# Altium PCB WeeMouseMasterCompact.PcbDoc
Units mm, origin at the board's own origin, x right, y up, seen from the top; angles counter-clockwise.
Board outline 15.6 x 17.3 mm, 2 copper layers (Top Layer, Bottom Layer), stack 1.671 mm thick; 6 components, 13 nets, 37 pads, 25 vias.
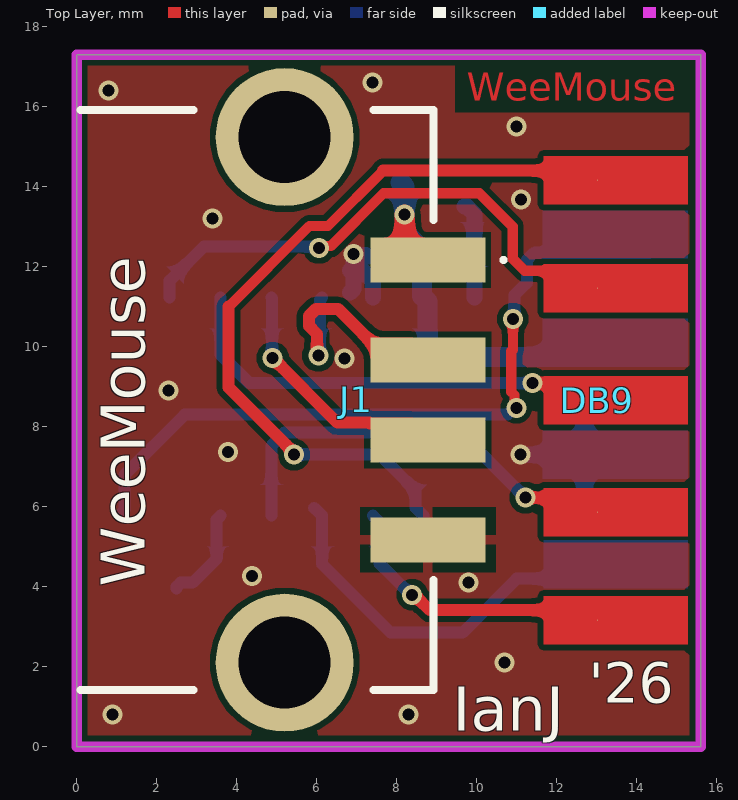
[diagram p0: Top Layer view]
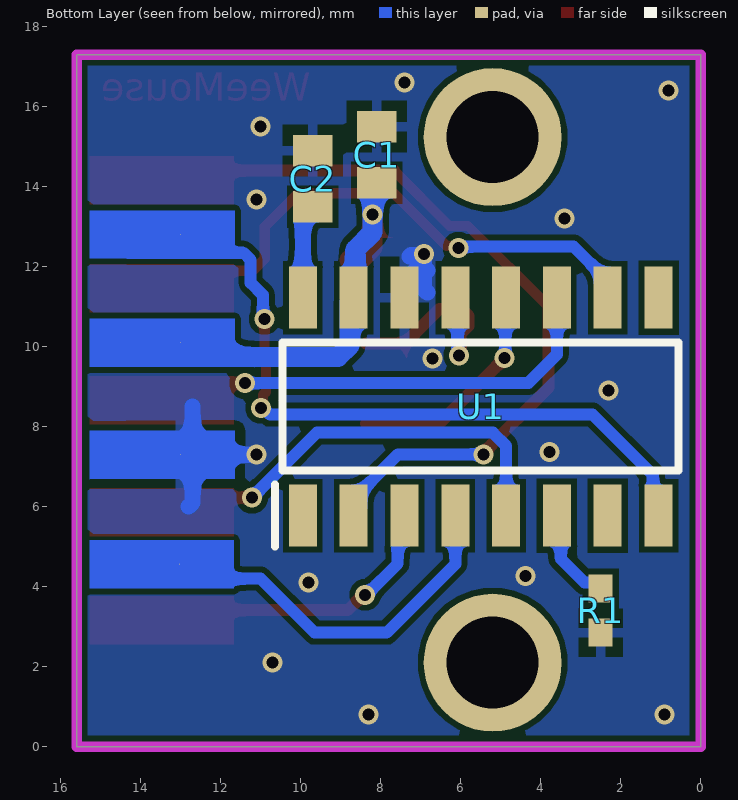
[diagram p1: Bottom Layer view, seen from below]

## Layer stack, top to bottom
Top Solder: solder mask 0.0102, Solder Resist, Dk 3.5
Top Layer: signal copper 0.0356
Dielectric 1: dielectric 0.2, FR-4, Dk 4.8
Dielectric 2: core 1.2, PP-006, Dk 4.1
Dielectric2: dielectric 0.2, FR-4, Dk 4.8
Bottom Layer: signal copper 0.0356
Bottom Solder: solder mask 0.0102, Solder Resist, Dk 3.5

## Board outline
0,0 0,17.3 15.6,17.3 15.6,0

## Design rules (kind name [scope] priority, off if disabled: settings)
Clearance [All] p1: gap=0.15 ignorepadtopadclearanceinfootprint=FALSE
HoleSize [All] p1: absolutevalues=TRUE maxlimit=5 minlimit=0.025 maxpercent=80.000 minpercent=20.000
MinimumSolderMaskSliver [All] p1: minsoldermaskwidth=0.05
PolygonConnect [All] p1: connectstyle=Relief reliefconductorwidth=0.254 reliefentries=4 polygonreliefangle="90 Angle" airgapwidth=0.254
RoutingVias [All] p1: holewidth=0.711 width=1.27 viastyle="Through Hole" minholewidth=0.711 minwidth=1.27 maxholewidth=0.711 maxwidth=1.27
SilkToSolderMaskClearance [IsPad] p1 off: minsilkscreentomaskgap=0.254 clearancetoexposedcopper=TRUE
SolderMaskExpansion [All] p1: expansion=0.102 istentingtop=FALSE
SupplyNets "Schematic Supply Nets_1" [InNet('GND')] p1: voltage=0.000
SupplyNets "Schematic Supply Nets" [InNet('VCC')] p2: voltage=0.000
Width [All] p1: maxlimit=0.5 minlimit=0.254 preferedwidth=0.254 minimp=50.000000 maximp=50.000000 favimp=50.000000
27 further rules are at their usual default settings.

## Classes and differential pairs
component class WeeMouse: C1 C2 J1 R1 U1

## Components (designator, comment, footprint, x,y, rotation, side; value= is the part's Value field where it differs from the comment)
C1 "100nF 0603" CAPC1608X90N 8.1,14.8 r90 bottom
C2 "100nF 0603" CAPC1608X90N 9.7,14.2 r270 bottom
DB9 "Comment" DB9Edge 11.675,2.561 r0 top locked
J1 "87583-2010BLF" 875832010BLF 1.92,8.67 r270 top locked
R1 "0402 1K" RESC1005X40N 2.5,3.4 r90 bottom
U1 "CH544G SOIC16" SOIC127P600X175-16N 5.5,8.5 r90 bottom locked

## Footprints (in the part's own frame and the unit in brackets; to place one, negate y for a bottom-side part, rotate by r counter-clockwise, add the part's x,y. Pads: shape width x height; smd on the part's side, far side on the other; paste and mask are expansions set on the pad)
875832010BLF [mm]
  rect 1.12x2.88 smd: 1(-3.5,6.86) 2(-1,6.86) 3(1,6.86) 4(3.5,6.86)
  round 3.45 hole 2.3: MH1(-6.57,3.28) MH2(6.57,3.28)
  silkscreen extent -7.25,-1.82 7.25,8.8, body extent -7.25,-6.79 7.25,8.09, height 7.49
CAPC1608X90N [mm]
  rect 0.78x0.99 smd: 1(-0.7,0) 2(0.7,0)
  body extent -0.8,-0.41 0.8,0.41, height 0.9
DB9Edge [mil]
  round 1 smd: 1(53.15,456.69) 2(53.15,350.39) 3(53.15,240.16) 4(53.15,129.92) 5(53.15,23.62)
  round 1 smd far side: 6(52.16,403.1) 7(52.16,296.8) 8(52.16,186.56) 9(53.15,78.74)
  Top Layer region: 141.73,480.31 141.73,433.07 106.3,433.07 0,433.07 0,480.31
  Top Layer region: 141.73,374.02 141.73,326.77 106.3,326.77 0,326.77 0,374.02 0,374.02
  Top Layer region: 106.3,263.78 141.73,263.78 141.73,216.54 106.3,216.54 0,216.54 0,263.78
  Top Layer region: 141.73,153.54 141.73,106.3 0,106.3 0,153.54 0,153.54
  Top Layer region: 141.73,47.24 141.73,0 106.3,0 0,0 0,47.24
  Bottom Layer region: 141.73,320.42 141.91,320.23 141.91,273.1 105.35,273.1 105.12,273.18 -0.99,273.18 -0.99,320.42 -0.99,320.42
  Bottom Layer region: 105.31,426.72 105.59,426.44 141.74,426.44 141.74,380.09 141.41,379.76 105.31,379.76 105.31,379.48 -0.99,379.48 -0.99,426.72
  Bottom Layer region: 105.31,210.19 105.5,210 141.77,210 141.77,162.57 141.6,162.74 105.03,162.94 -0.99,162.94 -0.99,210.19
  Bottom Layer region: 141.73,102.36 141.73,55.12 0,55.12 0,102.36 0,102.36
  body extent 31,-370 565,850, height 211
RESC1005X40N [mm]
  rect 0.7x0.6 smd: 1(-0.55,0) 2(0.55,0)
  body extent -0.5,-0.25 0.5,0.25, height 0.4
SOIC127P600X175-16N [mm]
  rect 1.55x0.7 smd: 1(-2.725,4.445) 2(-2.725,3.175) 3(-2.725,1.905) 4(-2.725,0.635) 5(-2.725,-0.635) 6(-2.725,-1.905) 7(-2.725,-3.175) 8(-2.725,-4.445) 9(2.725,-4.445) 10(2.725,-3.175) 11(2.725,-1.905) 12(2.725,-0.635) 13(2.725,0.635) 14(2.725,1.905) 15(2.725,3.175) 16(2.725,4.445)
  silkscreen extent -3.5,-4.95 1.6,5.15, body extent -3,-4.95 3,4.95, height 1.75

## Part data
C1 C2: library part 06033C104KAT4A, "Capacitor", Manufacturer_Name=AVX, Mouser Part Number=581-06033C104KAT4A, Arrow Part Number=06033C104KAT4A, Arrow Price/Stock=https://www.arrow.com/en/products/06033c104kat4a/avx?region=nac, Datasheet Link=http://www.mouser.com/catalog/supplier/library/pdf/AVXSurfaceMountCeramic.pdf, Height=0.9mm, Manufacturer_Part_Number=06033C104KAT4A, Mouser Price/Stock=https://www.mouser.co.uk/ProductDetail/AVX/06033C104KAT4A?qs=8C2chATdSPiv3E9zfPZulg%3D%3D
J1: "Connector", Manufacturer_Name="Amphenol Communications Solutions", Arrow Part Number=87583-2010BLF, Arrow Price/Stock=https://www.arrow.com/en/products/87583-2010blf/amphenol-fci?region=europe, Datasheet Link=https://cdn.amphenol-cs.com/media/wysiwyg/files/drawing/87583.pdf, Height=7.94mm, Manufacturer_Part_Number=87583-2010BLF
R1: library part CRCW04021K00JNED, "Resistor", LCSC Part #=C279981, Manufacturer_Name=Vishay, Mouser Part Number=71-CRCW0402J-1.0K-E3, Arrow Part Number=CRCW04021K00JNED, Arrow Price/Stock=https://www.arrow.com/en/products/crcw04021k00jned/vishay, Datasheet Link=http://www.vishay.com/docs/20035/dcrcwe3.pdf, Height=0.4mm, Manufacturer_Part_Number=CRCW04021K00JNED, Mouser Price/Stock=https://www.mouser.co.uk/ProductDetail/Vishay-Dale/CRCW04021K00JNED?qs=YX%252BK5oaHNYpGRsHVuzxl1A%3D%3D
U1: library part CH544G, "8051 MCU with USB host", Manufacturer_Name=onsemi, Manufacturer_Part_Number=MM74HC4049M

## Via types
v1: diameter 0.5, hole 0.3, Top Layer to Bottom Layer, tented both sides, 25 vias

## Nets (pads, with @x,y where several pads share a name; then routed paths per layer and width w, separated by ;. In a path a pad name is that pad's centre, name@x,y a point inside that pad or via, vN(x,y) a via of type N, cw(c..) or ccw(c..) an arc to the next point about the centre after c; other vN are vias at no path point)
ButL: DB9.6 U1.8 | length 17.5
  Top Layer w0.254: v1(10.905,10.696) 10.905,9.925 10.865,9.885 10.865,8.873 10.945,8.792 10.945,8.519 v1(10.992,8.472)
  Bottom Layer w0.3: U1.8 1.196,5.916 1.196,6.796 2.7,8.3 10.766,8.3 10.938,8.472 v1(10.992,8.472) ; v1(10.905,10.696) 10.943,10.734 10.943,11.29 11.251,11.598 11.251,12.169 11.427,12.344 12.544,12.344 DB9.6
ButM: DB9.3 U1.11 | length 11.3
  Top Layer w0.3: v1(11.392,9.091) 12.595,9.091 DB9.3
  Bottom Layer w0.3: U1.11 3.595,9.805 4.309,9.091 v1(11.392,9.091)
ButR: DB9.2 U1.10 | length 13.5
  Top Layer w0.254: v1(6.054,12.468) 6.101,12.515 6.35,12.515 7.671,13.836 10.064,13.836 10.9,13 10.9,12.2 11.2,11.9 11.7,11.9 12.139,11.461 DB9.2
  Bottom Layer w0.3: U1.10 2.325,11.65 3.177,12.502 6.02,12.502 v1(6.054,12.468)
GND: C1.2 C2.1 DB9.8 J1.4 R1.1 U1.14 | length 7.5
  Bottom Layer w0.4: 6.835,11.352 6.923,11.44 v1(6.923,12.314) v1@6.942,12.295 ; 6.835,11.9 6.935,11.8 U1.14@7.255,11.8 ; 7.278,12.254 7.237,12.295 v1@6.942,12.295 ; U1.14 7.405,11.65 U1.14@7.255,11.8 ; v1(11.1,7.3) DB9.8 ; 12.7,8.5 12.7,6.1 12.8,6 ; v1@6.942,12.295 6.942,12.113 U1.14@7.255,11.8
  other v1: 0.9,0.8 8.3,0.8 10.7,2.1 9.8,4.1 4.384,4.273 3.784,7.373 2.3,8.9 6.7,9.7 3.4,13.2 11.108,13.675 11,15.5 0.8,16.4 7.4,16.6
Reset: R1.2 U1.6 | length 2.5
  Bottom Layer w0.3: R1.2 2.5,4 2.6,4.1 2.9,4.1 3.498,4.698 3.498,5.678 U1.6
UDM: J1.2 U1.13 | length 5.6
  Top Layer w0.3: v1(6.041,9.781) 6.002,9.819 6.002,10.323 5.806,10.519 5.806,10.768 5.982,10.943 6.535,10.943 7.399,10.08 J1.2@8.37,10.08
  Bottom Layer w0.3: v1(6.041,9.781) 6.079,9.819 6.079,11.169 U1.13
UDP: J1.3 U1.12 | length 5.7
  Top Layer w0.3: v1(4.9,9.716) 6.516,8.1 7.314,8.1 7.334,8.08 J1.3@8.37,8.08
  Bottom Layer w0.3: U1.12 4.882,11.208 4.882,9.734 v1(4.9,9.716)
V33: C2.2 U1.16 | length 2.4
  Bottom Layer w0.4: C2.2 9.755,13.5 9.945,13.31 U1.16
VCC: C1.1 DB9.7 J1.1 U1.15 | length 10.4
  Top Layer w0.5: v1(8.2,13.3) 8.2,12.48 8.51,12.17 J1.1
  Bottom Layer w0.5: C1.1 8.2,14 8.2,12.864 8.632,12.432 8.632,11.268 8.775,11.125 8.775,10.034 9.068,9.741 12.641,9.741 DB9.7
X1: DB9.5 U1.3 | length 7.3
  Top Layer w0.3: v1(8.388,3.797) 8.443,3.797 8.828,3.412 12.775,3.412 DB9.5
  Bottom Layer w0.3: U1.3 7.574,5.606 7.574,4.577 8.354,3.797 v1(8.388,3.797)
X2: DB9.1 U1.2 | length 19.2
  Top Layer w0.254: 3.8,11 5.818,13.018 6.281,13.018 7.664,14.4
  Top Layer w0.3: 3.8,11 3.8,8.979 5.434,7.345 v1(5.434,7.3) ; 7.664,14.4 12.786,14.4 DB9.1
  Bottom Layer w0.3: v1(5.434,7.3) 5.442,7.308 7.567,7.308 8.475,6.4 8.475,5.975 U1.2
Y1: DB9.9 U1.4 | length 9.8
  Bottom Layer w0.3: U1.4@5.938,5.972 U1.4 6.135,4.565 7.85,2.85 9.65,2.85 11,4.2 12.2,4.2 12.561,4.561 DB9.9
Y2: DB9.4 U1.5 | length 10.9
  Top Layer w0.3: v1(11.217,6.229) 11.964,6.229 12.332,5.861 DB9.4
  Bottom Layer w0.3: U1.5 4.865,7.517 5.198,7.85 9.596,7.85 v1(11.217,6.229)
pads on no net: J1.MH1 J1.MH2 U1.1 U1.7 U1.9

## Polygon pours and split planes (outlines as drawn)
GND on Bottom Layer "NONET_L-01_P-001" (solid, remove dead copper, pour order 1): 0.189,0 15.6,0 15.6,17.2 0.137,17.2
GND on Top Layer "NONET_L-01_P-001" (solid, remove dead copper, pour order 0): 0.189,0 15.6,0 15.6,17.2 0.137,17.2

## Keep-outs
Keep-Out Layer:
  the board outline again, w0.254

## Other copper
Top Layer:
  text "WeeMouse" at 9.75,16.15 h0.7

## Silkscreen, mask and mechanical layers (free items; w line width, h text height)
Top Overlay:
  text "WeeMouse" at 1.7,4 h1.1 r90
  text "'26" at 12.8,1.1 h1
  text "IanJ" at 9.4,0.4 h1.1
Board Shape:
  the board outline again, w0.254